# Altium PCB pibs_2u_diff_usb_eth.PcbDoc
Units mil, origin at the board's own origin, x right, y up, seen from the top; angles counter-clockwise.
Board outline 4230 x 1950 mil, 2 copper layers (Top Layer, Bottom Layer); 31 components, 39 nets, 212 pads, 20 vias.
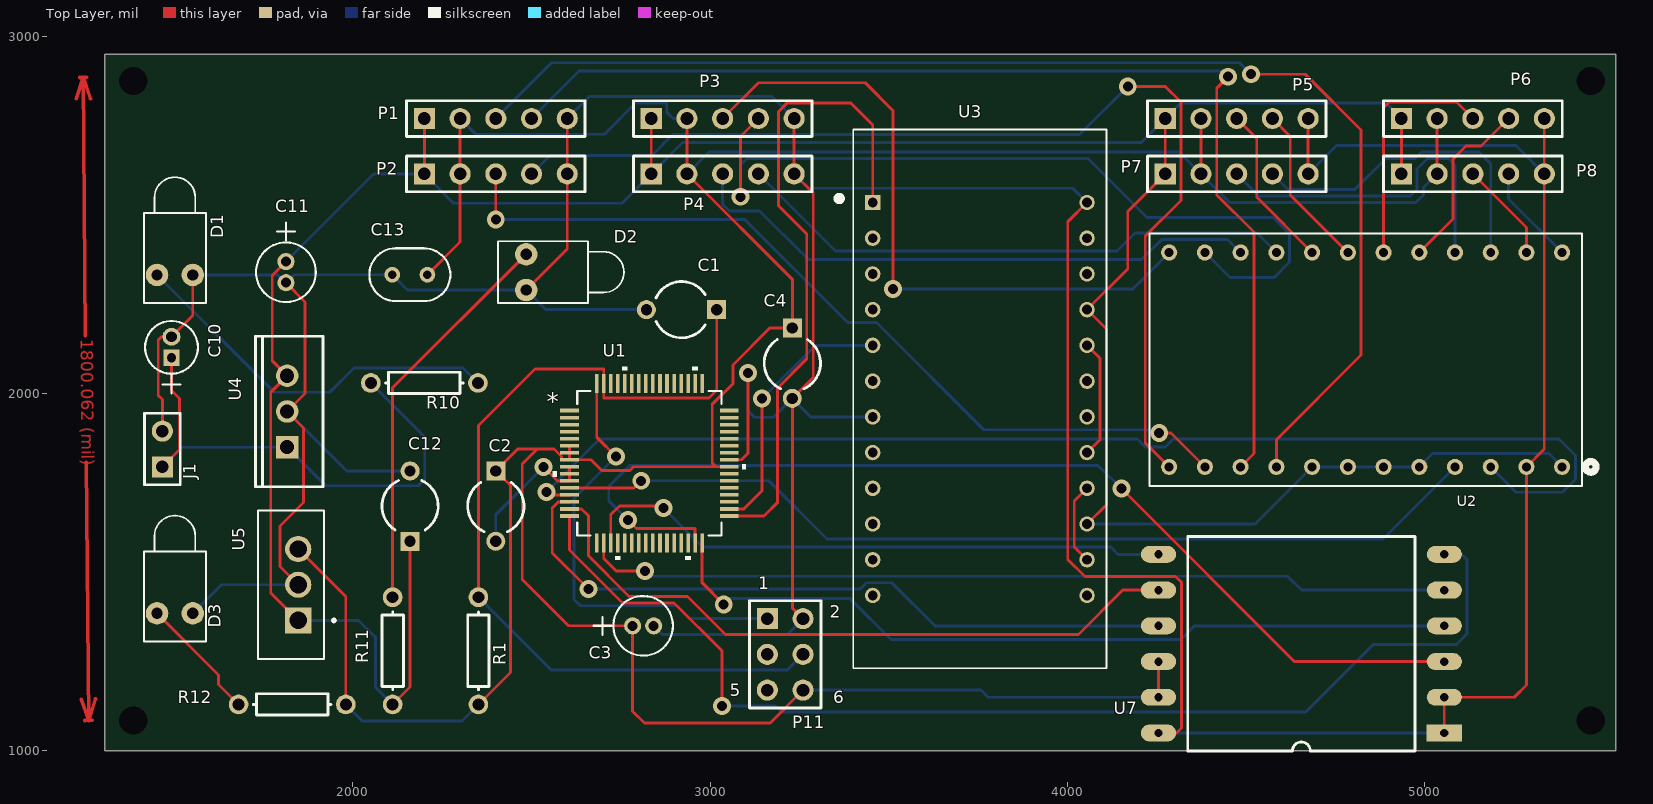
[diagram p0: Top Layer view]
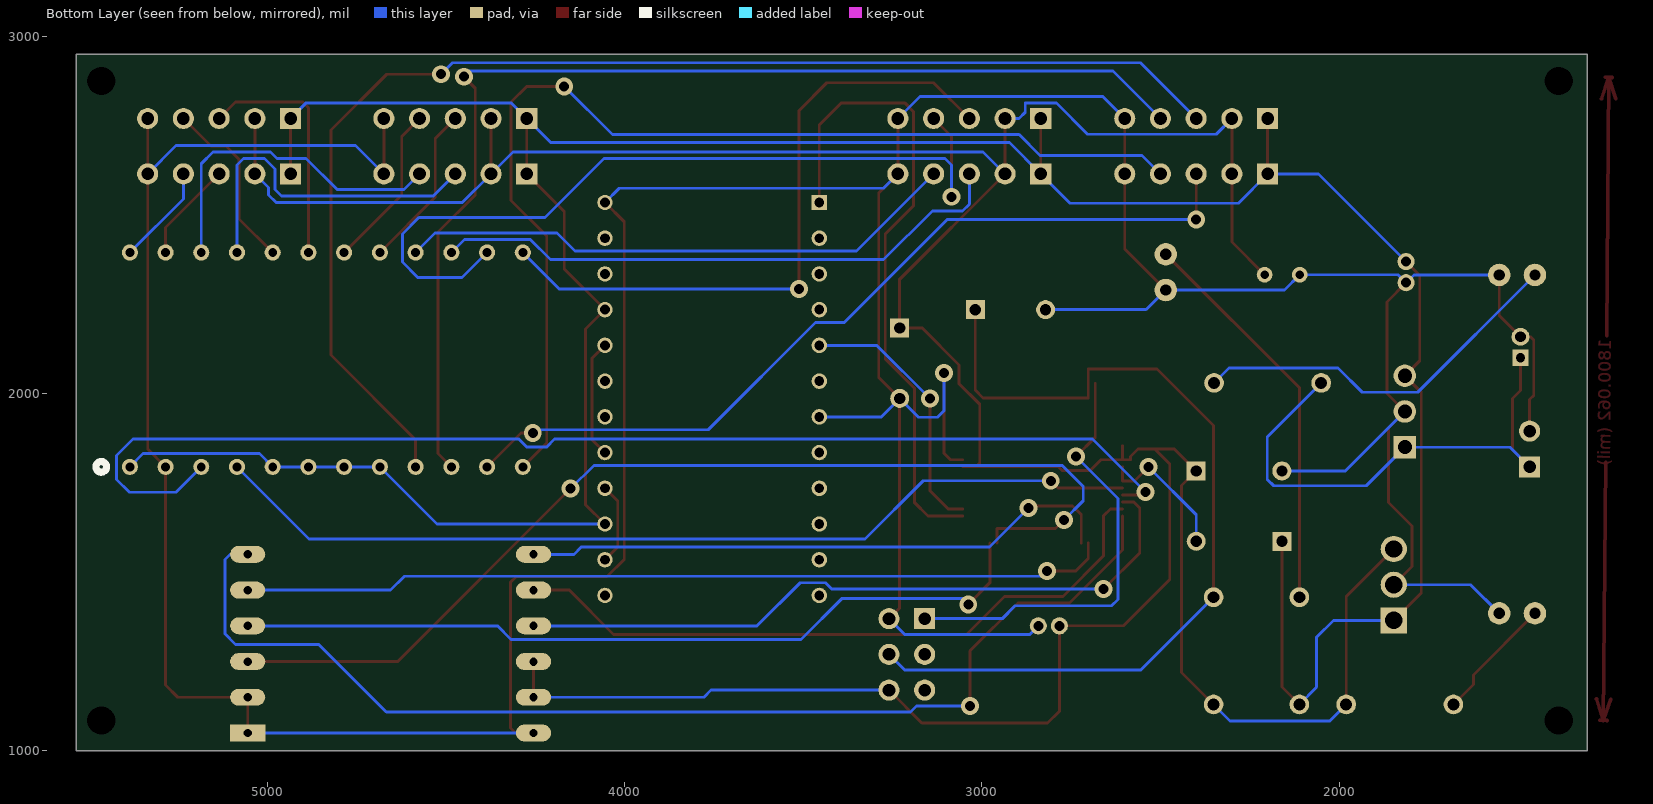
[diagram p1: Bottom Layer view, seen from below]

## Layer stack, top to bottom
Top Solder: solder mask 0.4, Solder Resist, Dk 3.5
Top Layer: signal copper 1.4
Dielectric 1: dielectric 12.6, FR-4, Dk 4.8
Bottom Layer: signal copper 1.4
Bottom Solder: solder mask 0.4, Solder Resist, Dk 3.5

## Board outline
1305,1000 5535,1000 5535,2950 3950,2950 1305,2950 1305,1980

## Design rules (kind name [scope] priority, off if disabled: settings)
Clearance [All] p1: gap=10
PolygonConnect [All] p1: connectstyle=Relief reliefconductorwidth=10 reliefentries=4 polygonreliefangle="90 Angle" airgapwidth=10
RoomDefinition um232r [InComponentClass('um232r')] p1: confinementstyle=ConfineIn formatcopy=TRUE lockcomponents=FALSE outline 0,0 2000,0 2000,1000 0,1000
RoomDefinition i2c_mux [InComponentClass('i2c_mux')] p2: confinementstyle=ConfineIn formatcopy=TRUE lockcomponents=FALSE outline 0,0 2000,0 2000,1000 0,1000
RoomDefinition ethernet [InComponentClass('ethernet')] p3: confinementstyle=ConfineIn formatcopy=TRUE lockcomponents=FALSE outline 0,0 2000,0 2000,1000 0,1000
RoomDefinition power [InComponentClass('power')] p4: confinementstyle=ConfineIn formatcopy=TRUE lockcomponents=FALSE outline 7045,3950 9930,3950 9930,4730 7045,4730
RoomDefinition micro [InComponentClass('micro')] p5: confinementstyle=ConfineIn formatcopy=TRUE lockcomponents=FALSE outline 7045,3540 8340,3540 8340,4000 7045,4000
RoomDefinition headers [InComponentClass('headers')] p6: confinementstyle=ConfineIn formatcopy=TRUE lockcomponents=FALSE outline 7045,2960 7265,2960 7265,3485 7045,3485
RoutingVias [All] p1: holewidth=28 width=50 viastyle="Through Hole" minholewidth=28 minwidth=50 maxholewidth=28 maxwidth=50
SolderMaskExpansion [All] p1: expansion=4
Width [All] p1: maxlimit=10 minlimit=5 preferedwidth=8
30 further rules are at their usual default settings.

## Classes and differential pairs
component class power: C10 C11 C12 C13 D1 D2 D3 J1 R10 R11 R12 U4 U5
component class micro: C1 C2 C3 C4 R1 U1
component class headers: P1 P2 P3 P4 P5 P6 P7 P8 P11
component class ethernet: U7
component class i2c_mux: U2
component class um232r: U3
net class SC[7..0]: SC0 SC1 SC2 SC3 SC4 SC5 SC6 SC7
net class SD[7..0]: SD0 SD1 SD2 SD3 SD4 SD5 SD6 SD7

## Components (designator, comment, footprint, x,y, rotation, side; value= is the part's Value field where it differs from the comment)
C1 "Cap2" CAPR5-4X5 2920,2235 r180 top
C2 "Cap2" CAPR5-4X5 2400,1685 r270 top
C3 "10u" CAP_UHC_4X7_NCH 2782.97,1350 r0 top
C4 "Cap2" CAPR5-4X5 3230,2085 r270 top
C10 "2.2u" PCAP_3x5-THRU-ELECT_NCA 1492.13,2100 r90 top
C11 "10u" CAP_UHC_4X7_NCH 1812.44,2369.41 r270 top
C12 "Cap2" CAPR5-4X5 2160,1685 r90 top
C13 "33u" CAP_FG16X5R1E336MRT06_TDK 2159.32,2332.89 r0 top
D1 "LED1" LED-1 1501.74,2332.13 r90 top
D2 "LED1" LED-1 2485,2340 r0 top
D3 "LED1" LED-1 1501.74,1385 r90 top
J1 "Header 2" HDR1X2 1466.56,1795 r90 top
P1 "Header 5" HDR1X5 2200,2770 r0 top
P2 "Header 5" HDR1X5 2200,2615 r0 top
P3 "Header 5" HDR1X5 2835,2770 r0 top
P4 "Header 5" HDR1X5 2835,2615 r0 top
P5 "Header 5" HDR1X5 4273.94,2770 r0 top
P6 "Header 5" HDR1X5 4935,2770 r0 top
P7 "Header 5" HDR1X5 4273.94,2615 r0 top
P8 "Header 5" HDR1X5 4935,2615 r0 top
P11 "Prog" HDR2X3 3160,1370 r270 top
R1 "Res1" AXIAL-0.3 2351.26,1280 r270 top
R10 "Res1" AXIAL-0.3 2200,2030 r180 top
R11 "Res1" AXIAL-0.3 2111.26,1280 r270 top
R12 "Res1" AXIAL-0.3 1830,1130 r0 top
U1 "MCF51QE128CLH" QFP64_FRE 2830,1805 r0 top
U2 "1-390262-1" 1-390262-1_TYC 5385,1795 r180 top
U3 "UM232R" MODULE_UM232R 3755,1985 r0 top
U4 "LT323AT#PBF" TO-220-AB 1815.96,1950 r90 top
U5 "LM3940IT-3.3" TO254P1054X470X1955-3 1846.86,1465 r90 top
U7 "wiz810smj" wiznet_DIP12 5055,1050 r180 top

## Footprints (in the part's own frame and the unit in brackets; to place one, negate y for a bottom-side part, rotate by r counter-clockwise, add the part's x,y. Pads: shape width x height; smd on the part's side, far side on the other; paste and mask are expansions set on the pad)
1-390262-1_TYC [mil]
  round 45 hole 25 mask+0: 1(0,0) 2(100,0) 3(200,0) 4(300,0) 5(400,0) 6(500,0) 7(600,0) 8(700,0) 9(800,0) 10(900,0) 11(1000,0) 12(1100,0) 13(1100,-600) 14(1000,-600) 15(900,-600) 16(800,-600) 17(700,-600) 18(600,-600) 19(500,-600) 20(400,-600) 21(300,-600) 22(200,-600) 23(100,-600) 24(0,-600)
  silkscreen extent -95,-654 1155,54, body extent 0,0 10,10, height 10
AXIAL-0.3 [mm] "Axial Device, Thru-Hole; 2 Leads; 0.3 in Pin Spacing"
  round 1.4 hole 0.85: 1(-3.81,0) 2(3.81,0)
  silkscreen extent -2.77,-0.76 2.77,0.76
CAP_FG16X5R1E336MRT06_TDK [mil]
  round 44 / inner round 60 / far side round 44 hole 24 mask+0: 1(-49.21,0) 2(49.21,0)
  silkscreen extent -113,-74 114,74, body extent -59,-69 158,69, height 236
CAP_UHC_4X7_NCH [mil]
  round 48 / inner round 60 / far side round 48 hole 28 mask+0: 1(0,0) 2(59.06,0)
  silkscreen extent -109,-83 113,83, body extent -49,-78 109,78, height 316
CAPR5-4X5 [mm] "Capacitor; 2 Leads"
  rect 1.35x1.35 hole 0.8: 1(-2.5,0)
  round 1.35 hole 0.8: 2(2.5,0)
  silkscreen extent -1.69,-2 1.82,2
HDR1X2 [mm] "Connector; Header; 2 Position"
  rect 1.5x1.5 hole 0.9: 1(0,0)
  round 1.5 hole 0.9: 2(2.54,0)
  silkscreen extent -1.27,-1.27 3.81,1.27
HDR1X5 [mm] "Connector; Header; 5 Position"
  rect 1.5x1.5 hole 0.9: 1(0,0)
  round 1.5 hole 0.9: 2(2.54,0) 3(5.08,0) 4(7.62,0) 5(10.16,0)
  silkscreen extent -1.27,-1.27 11.43,1.27
HDR2X3 [mm] "Connector; Header; 3x2 Position"
  rect 1.5x1.5 hole 0.9: 1(0,0)
  round 1.5 hole 0.9: 2(0,2.54) 3(2.54,0) 4(2.54,2.54) 5(5.08,0) 6(5.08,2.54)
  silkscreen extent -1.27,-1.27 6.35,3.81
LED-1 [mm] "LED; 2 Leads"
  round 1.6 hole 0.8: 1(0,1.27) 2(0,-1.27)
  silkscreen extent -2,-2.2 6.95,2.2
MODULE_UM232R [mm]
  rect 1.1x1.1 hole 0.7: 1(-7.62,13.97)
  round 1.1 hole 0.7: 2(-7.62,11.43) 3(-7.62,8.89) 4(-7.62,6.35) 5(-7.62,3.81) 6(-7.62,1.27) 7(-7.62,-1.27) 8(-7.62,-3.81) 9(-7.62,-6.35) 10(-7.62,-8.89) 11(-7.62,-11.43) 12(-7.62,-13.97) 13(7.62,-13.97) 14(7.62,-11.43) 15(7.62,-8.89) 16(7.62,-6.35) 17(7.62,-3.81) 18(7.62,-1.27) 19(7.62,1.27) 20(7.62,3.81) 21(7.62,6.35) 22(7.62,8.89) 23(7.62,11.43) 24(7.62,13.97)
  silkscreen extent -10.2,-19.15 9,19.15
PCAP_3x5-THRU-ELECT_NCA [mil]
  rect 46x46 / inner round 60 / far side rect 46x46 hole 26 mask+0: 1(0,0)
  round 50 / inner round 60 / far side round 50 hole 30 mask+0: 2(59.06,0)
  silkscreen extent -99,-74 103,74, body extent -39,-69 100,69, height 188
QFP64_FRE [mil]
  rect 53x10 smd paste+0 mask+0: 1(-223.5,147.64) 2(-223.5,127.95) 3(-223.5,108.27) 4(-223.5,88.58) 5(-223.5,68.9) 6(-223.5,49.21) 7(-223.5,29.53) 8(-223.5,9.84) 9(-223.5,-9.84) 10(-223.5,-29.53) 11(-223.5,-49.21) 12(-223.5,-68.9) 13(-223.5,-88.58) 14(-223.5,-108.27) 15(-223.5,-127.95) 16(-223.5,-147.64) 33(223.5,-147.64) 34(223.5,-127.95) 35(223.5,-108.27) 36(223.5,-88.58) 37(223.5,-68.9) 38(223.5,-49.21) 39(223.5,-29.53) 40(223.5,-9.84) 41(223.5,9.84) 42(223.5,29.53) 43(223.5,49.21) 44(223.5,68.9) 45(223.5,88.58) 46(223.5,108.27) 47(223.5,127.95) 48(223.5,147.64)
  rect 10x53 smd paste+0 mask+0: 17(-147.64,-223.5) 18(-127.95,-223.5) 19(-108.27,-223.5) 20(-88.58,-223.5) 21(-68.9,-223.5) 22(-49.21,-223.5) 23(-29.53,-223.5) 24(-9.84,-223.5) 25(9.84,-223.5) 26(29.53,-223.5) 27(49.21,-223.5) 28(68.9,-223.5) 29(88.58,-223.5) 30(108.27,-223.5) 31(127.95,-223.5) 32(147.64,-223.5) 49(147.64,223.5) 50(127.95,223.5) 51(108.27,223.5) 52(88.58,223.5) 53(68.9,223.5) 54(49.21,223.5) 55(29.53,223.5) 56(9.84,223.5) 57(-9.84,223.5) 58(-29.53,223.5) 59(-49.21,223.5) 60(-68.9,223.5) 61(-88.58,223.5) 62(-108.27,223.5) 63(-127.95,223.5) 64(-147.64,223.5)
  silkscreen extent -270,-270 270,270, body extent -236,-236 236,236, height 63
TO254P1054X470X1955-3 [mm]
  rect 1.86x1.86 hole 1.24: 1(-2.54,0)
  round 1.86 hole 1.24: 2(0,0) 3(2.54,0)
  silkscreen extent -5.27,-2.64 5.27,2.86, body extent -5.08,-2.29 5.08,2.29, height 19.56
TO-220-AB [mm] "TO, Thru-Hole, Vertical, Heatsink Mounted; 3 In-Line Leads; Pitch 2.54 mm"
  rect 1.6x1.6 hole 1: 1(-2.54,0)
  round 1.6 hole 1: 2(0,0) 3(2.54,0)
  silkscreen extent -5.35,-2.55 5.35,2.25
wiznet_DIP12 [mm]
  rect 2.5x1.2 hole 0.6: 1(0,0)
  oval 2.5x1.2 hole 0.6: 2(0,-2.54) 3(0,-5.08) 4(0,-7.62) 5(0,-10.16) 6(0,-12.7) 7(20.32,-12.7) 8(20.32,-10.16) 9(20.32,-7.62) 10(20.32,-5.08) 11(20.32,-2.54) 12(20.32,0)
  silkscreen extent 2.08,-13.97 18.24,1.27

## Part data
C1 C2 C4 C12: "Capacitor"
C3: library part USA1C100MDD1TE, "No Description Available"
C10: library part UMA1V2R2MCD2, "No Description Available"
C11: library part USR1E100MDD1TE, "No Description Available"
C13: library part FG16X5R1E336MRT06, "No Description Available"
D1 D2 D3: "Typical RED GaAs LED"
J1: "Header, 2-Pin"
P1 P2 P3 P4 P5 P6 P7 P8: "Header, 5-Pin"
P11: library part "Header 3X2", "Header, 3-Pin, Dual row"
R1 R10 R11 R12: "Resistor"
U1 U2 U4: "No Description Available"
U3: "FT232R USB 2.0 to UART (RS232) Bridge Interface Evaluation Board"
U5: "1-A, low-dropout voltage regulator for 5-V to 3.3-V conversion 3-TO-220 -40 to 125"

## Free pads (board coordinates)
  round 60 hole 78.74 unplated: 1(1385,2875) 1(5465,2875) 2(1385,1085) 2(5465,1085)

## Via types
v1: diameter 50, hole 28, Top Layer to Bottom Layer, 20 vias

## Nets (pads, with @x,y where several pads share a name; then routed paths per layer and width w, separated by ;. In a path a pad name is that pad's centre, name@x,y a point inside that pad or via, vN(x,y) a via of type N, cw(c..) or ccw(c..) an arc to the next point about the centre after c; other vN are vias at no path point)
GND: C1.2 C3.2 C4.2 C10.2 C11.2 C12.2 C13.1 D1.2 D2.2 D3.2 J1.2 P1.5 P2.5 P3.5 P4.5 P5.5 P6.5 P7.5 P8.5 P11.2 U1.41 U2.2 U3.7 U3.24 U4.2 U5.2 U7.1 U7.2 U7.12 | length 13763.1
  Top Layer w8: J1.2 1466.56,1983.44 1455,1995 1455,2150.06 1464,2159.06 C10.2 1551.74,2218.67 D1.2 ; C11.2 1866,2256.8 1866,2000.04 U4.2 1862,1903.96 1862,1695 1796,1629 1796,1515.87 U5.2 ; D2.2 2600,2405 P2.5 P1.5 ; U1.41 3088,1814.84 3106,1832.84 v1(3106,2058) ; P3.5 P4.5 3288.58,2561.42 3288.58,2045.15 C4.2 3230,1400 P11.2 ; U3.24 4001,2481 4001,1536 4049,1488 4303,1488 4319,1472 4319,1064 4305,1050 U7.12 ; P7.5 P5.5 ; U7.1 U7.2 5251,1150 5285,1184 U2.2 5335,1845 P8.5 P6.5
  Bottom Layer w8: D3.2 1631.74,1465 U5.2 ; D1.2 1790.67,2332.13 C11.2 1834.97,2332.89 C13.1 2153,2290 D2.2 2540,2235 C1.2 ; U4.2 1982.54,1783.43 C12.2 ; P1.5 2661.53,2831.53 3173.47,2831.53 P3.5 ; C3.2 2866.03,1326 3216,1326 P11.2 ; v1(3106,2058) 3106,1952 3124,1934 3177.43,1934 C4.2 3281.57,1935 U3.7 ; P4.5 3275,2575 4015,2575 U3.24 ; U7.12 U7.1 ; P7.5 4753.47,2694.53 5255.47,2694.53 P8.5
NetC1_1: C1.1 P11.4 R1.1 U1.63 | length 2540.3
  Top Layer w8: R1.1 2351.26,1911 2509.26,2069 2702.05,2069 U1.63 2702.05,1988 2996.64,1988 3018.43,2009.79 C1.1
  Bottom Layer w8: R1.1 2555.26,1226 3216,1226 P11.4
NetC2_2: C2.2 U1.9 U1.10 U1.11 | length 391.6
  Top Layer w8: v1(2533.5,1794.5) 2572.21,1755.79 U1.11 U1.10 U1.9
  Bottom Layer w8: C2.2 2400,1661 v1(2533.5,1794.5)
NetD1_1: D1.1 R10.1 | length 1079.7
  Bottom Layer w8: D1.1 1779.87,2004 1935,2004 2003,2072 2308,2072 R10.1
NetD2_1: D2.1 R11.1 | length 1114.8
  Top Layer w8: R11.1 2111.26,2016.26 D2.1
NetD3_1: D3.1 R12.1 | length 349.5
  Top Layer w8: D3.1 1624,1212.74 1624,1186 R12.1
NetP11_1: P11.1 U1.64 | length 1238.8
  Top Layer w8: U1.64 2682.36,1877.64 v1(2736,1824)
  Bottom Layer w8: v1(2736,1824) 2618.85,1706.85 2618.85,1424 2636.85,1406 2907,1406 2943,1370 P11.1
NetU1_12: U1.12 U2.4 | length 2637.9
  Top Layer w8: U1.12 2787.1,1736.1 v1(2807,1756)
  Bottom Layer w8: v1(2807,1756) 3164,1756 3327,1593 4883,1593 U2.4
NetU1_13: U1.13 U2.3 | length 3396.1
  Top Layer w8: v1(2541.57,1724.43) 2549.58,1716.42 U1.13
  Bottom Layer w8: v1(2541.57,1724.43) 2690.14,1873 4195.8,1873 4218.11,1850.69 4273.8,1850.69 4296.11,1873 5376,1873 5422,1827 5422,1760 5386,1724 5256,1724 U2.3
NetU1_14: U1.14 U7.9 | length 1977.6
  Top Layer w8: U1.14 2574.73,1696.73 2558,1680 2558,1554 v1(2659,1453)
  Bottom Layer w8: v1(2659,1453) 3420,1453 3437.65,1470.65 3508.35,1470.65 3629,1350 U7.9
NetU1_15: U1.15 U7.8 | length 1910.9
  Top Layer w8: U1.15 2640,1677.05 2659,1658.05 2659,1545.97 2772.97,1432 2937,1432 3043,1326 4031,1326 4155,1450 U7.8
NetU1_16: U1.16 U7.6 | length 3253.9
  Top Layer w8: U1.16 2606.5,1562.5 2755,1414 2899,1414 3033,1280 v1(3033,1126)
  Bottom Layer w8: v1(3033,1126) 3183,1126 3200,1109 4667,1109 4856,1298 5089,1298 5119,1328 5119,1536 5105,1550 U7.6
NetU1_18: U1.18 U7.5 | length 2432.9
  Top Layer w8: U1.18 2702.05,1538.04 2737.09,1503 v1(2818,1503)
  Bottom Layer w8: v1(2818,1503) 2832.35,1488.65 4616.35,1488.65 4655,1450 U7.5
NetU1_19: U1.19 U7.7 | length 1679.5
  Top Layer w8: U1.19 2721.73,1661.3 2746.31,1685.87 2863.13,1685.87 v1(2869,1680)
  Bottom Layer w8: v1(2869,1680) 2978.35,1570.65 4121.35,1570.65 4142,1550 U7.7
NetU1_31: U1.31 U7.3 | length 2945.8
  Top Layer w8: v1(2770,1646) 2794,1622 2957.95,1622 U1.31 ; v1(4151,1734) 4635,1250 U7.3
  Bottom Layer w8: v1(2770,1646) 2716,1700 2716,1740.26 2774.74,1799 4086,1799 v1(4151,1734)
NetU1_32: U1.32 U7.4 | length 2283.1
  Top Layer w8: U1.32 2977.64,1470.36 v1(3038,1410)
  Bottom Layer w8: v1(3038,1410) 3054,1426 3392,1426 3506,1312 4318,1312 4356,1350 U7.4
NetU1_33: U1.33 U3.1 | length 1828.3
  Top Layer w8: U1.33 3150.36,1657.36 3189,1696 3189,2016 3270.58,2097.58 3270.58,2446.42 3191,2526 3191,2789 3216,2814 3393,2814 3455,2752 U3.1
NetU1_34: U1.34 U3.5 | length 742.3
  Top Layer w8: U1.34 3094,1677.05 3145,1728.05 v1(3145,1986)
  Bottom Layer w8: v1(3145,1986) 3294,2135 U3.5
NetU3_14: U3.14 U3.16 | length 229.8
  Top Layer w8: U3.14 4019,1571 4019,1699 U3.16
NetU3_17: U3.17 U3.20 | length 329.8
  Top Layer w8: U3.17 4091,1871 4091,2099 U3.20
SC0: P1.4 U2.10 | length 3175.4
  Top Layer w8: v1(4450,2887) 4418,2855 4418,2556 4522,2452 4522,1832 U2.10
  Bottom Layer w8: P1.4 2633,2903 4434,2903 v1(4450,2887)
SC1: P2.4 U2.12 | length 3027.9
  Top Layer w8: v1(4169,2860) 4274,2860 4318,2816 4318,2541 4218,2441 4218,1862 U2.12
  Bottom Layer w8: P2.4 2552,2667 2837.5,2667 2895.5,2725 4034,2725 v1(4169,2860)
SC2: P3.4 U2.14 | length 2323.8
  Top Layer w8: v1(3085,2551) 3085,2720 P3.4
  Bottom Layer w8: v1(3085,2551) 3085,2640 3103.53,2658.53 4057.47,2658.53 4223,2493 4576,2493 4622,2447 4622,2368 4579,2325 4455,2325 U2.14
SC3: P4.4 U2.16 | length 1583
  Bottom Layer w8: P4.4 3351,2399 4138.81,2399 4189.31,2449.5 4530.5,2449.5 U2.16
SC4: P5.4 U2.18 | length 462.4
  Top Layer w8: P5.4 4624,2719.94 4624,2556 U2.18
SC5: P6.4 U2.20 | length 503.2
  Top Layer w8: U2.20 5079,2489 5079,2656 5116,2693 5158,2693 P6.4
SC6: P7.4 U2.22 | length 934.8
  Bottom Layer w8: P7.4 4617.47,2571.47 4804.42,2571.47 4891.47,2658.53 4973.47,2658.53 4991.47,2676.53 5152,2676.53 5185,2643.53 U2.22
SC7: P8.4 U2.24 | length 282.1
  Bottom Layer w8: P8.4 5235,2545 U2.24
SD0: P1.3 U2.9 | length 3605.7
  Top Layer w8: v1(4514,2894) 4666,2894 4822,2738 4822,2108 4585,1871 U2.9
  Bottom Layer w8: P1.3 2556,2926 4482,2926 v1(4514,2894)
SD1: P2.3 U2.11 | length 2399.6
  Top Layer w8: v1(2400,2487) P2.3 ; v1(4257,1890) 4290,1890 U2.11
  Bottom Layer w8: v1(2400,2487) 3097,2487 3385,2199 3466,2199 3766,1899 4248,1899 v1(4257,1890)
SD2: P3.3 U2.13 | length 1865
  Top Layer w8: P3.3 3135,2870 3434,2870 3512,2792 v1(3512,2293)
  Bottom Layer w8: v1(3512,2293) 4183,2293 U2.13
SD3: P4.3 U2.15 | length 1637.6
  Bottom Layer w8: P4.3 3035,2530.29 3053.82,2511.47 3138.53,2511.47 3275,2375 4207.5,2375 4264,2431.5 4448.5,2431.5 U2.15
SD4: P5.3 U2.17 | length 462.4
  Top Layer w8: P5.3 4530,2713.94 4530,2550 U2.17
SD5: P6.3 U2.19 | length 680.7
  Top Layer w8: U2.19 4885,2800 4901,2816 5089,2816 P6.3
SD6: P7.3 U2.21 | length 966.5
  Bottom Layer w8: P7.3 4535.47,2553.47 4960.53,2553.47 4978.53,2571.47 4978.53,2629.06 5008,2658.53 5066.47,2658.53 5085,2640 U2.21
SD7: P8.3 U2.23 | length 282.1
  Top Layer w8: P8.3 5285,2465 U2.23
VCC: C10.1 J1.1 R10.2 U4.1 | length 1476.5
  Top Layer w8: J1.1 1515,1843.44 1515,1986 1492.13,2008.87 C10.1
  Bottom Layer w8: J1.1 1521.56,1850 U4.1 1923.96,1742 2183,1742 2201,1760 2201,1879 R10.2
VDDA: C2.1 C3.1 C4.1 C13.2 P1.2 P2.2 P3.2 P4.2 P5.2 P6.2 P7.2 P8.2 P11.6 R1.2 R12.2 U1.6 U1.7 U1.8 U1.40 U5.3 U7.10 U7.11 | length 9944.4
  Top Layer w8: U5.3 1980,1431.87 R12.2 ; C13.2 2300,2424.35 P2.2 P1.2 ; R1.2 2441,1219.74 2441,1742.43 C2.1 2461.57,1845 2515.82,1845 ; U1.6 U1.7 U1.8 ; P3.2 P4.2 3230,2320 C4.1 3166.94,2183.43 3063.51,2080 3063.51,2027.58 3005.93,1970 3005.93,1805.23 3016,1795.16 ; U1.40 3016,1795.16 ; P11.6 3168,1078 2816,1078 2782.97,1111.03 C3.1 2603.56,1350 2474,1479.56 2474,1803.18 2515.82,1845 ; U7.11 U7.10 ; P7.2 P5.2 ; P8.2 P6.2 ; 2515.82,1845 2563,1845 2584,1824 2584,1814.84 U1.8 ; U1.8 2666.38,1814.84 2696.74,1784.48 2774.74,1784.48 2785.42,1795.16 3016,1795.16
  Bottom Layer w8: R12.2 2026,1084 2305.26,1084 R1.2 ; P1.2 2344,2726 2703.94,2726 2791.47,2813.53 2878.53,2813.53 2878.53,2787.47 2896,2770 P3.2 ; P4.2 2996.53,2676.53 4312.41,2676.53 P7.2 4453.47,2535.47 4976,2535.47 4996.53,2556 4996.53,2576.53 P8.2 ; P11.6 3758,1170 3778,1150 U7.11
VDDB: C11.1 C12.1 P1.1 P2.1 P3.1 P4.1 P5.1 P6.1 P7.1 P8.1 R11.2 U2.1 U2.5 U2.6 U2.7 U2.8 U3.15 U3.21 U4.3 U5.1 | length 8564.2
  Top Layer w8: C11.1 1774,2330.97 1774,2091.96 U4.3 1770,2004.04 1770,1441.87 U5.1 ; R11.2 2160,1178.74 C12.1 ; P2.1 P1.1 ; P4.1 P3.1 ; U3.15 4109,1689 4109,2181 U3.21 4169,2349 4169,2510.06 P7.1 P5.1 ; P8.1 P6.1
  Bottom Layer w8: C11.1 2058.03,2615 P2.1 2282,2533 2753,2533 P4.1 2923,2703 4206.94,2703 P5.1 4317.94,2814 4891,2814 P6.1 ; U5.1 2016,1365 2063,1318 2063,1178.26 R11.2 ; U3.15 4525,1635 U2.8 U2.7 U2.6 U2.5 5022,1832 5348,1832 U2.1
pads on no net: P11.3 P11.5 U1.1 U1.2 U1.3 U1.4 U1.5 U1.17 U1.20 U1.21 U1.22 U1.23 U1.24 U1.25 U1.26 U1.27 U1.28 U1.29 U1.30 U1.35 U1.36 U1.37 U1.38 U1.39 U1.42 U1.43 U1.44 U1.45 U1.46 U1.47 U1.48 U1.49 U1.50 U1.51 U1.52 U1.53 U1.54 U1.55 U1.56 U1.57 U1.58 U1.59 U1.60 U1.61 U1.62 U3.2 U3.3 U3.4 U3.6 U3.8 U3.9 U3.10 U3.11 U3.12 U3.13 U3.18 U3.19 U3.22 U3.23
copper on no net: | length 1737.6
  Top Layer w10: 1225.5,2824.84 1245,2885 ; 1235,2884.92 1255,2885.08 ; 1239.5,1144.83 1260,1085 ; 1250,1084.92 1270,1085.08 ; 1251.02,2162.71 1245,2885 ; 1253.98,1807.29 1260,1085 ; 1265.5,2825.17 1245,2885 ; 1279.5,1145.16 1260,1085

## Other copper
Top Layer:
  text "1800.062 (mil)" at 1225.91,2152.51 h60 r270.48

## Silkscreen, mask and mechanical layers (free items; w line width, h text height)
Drill Drawing:
  circle w10: c1135.62,4145.83 r33.33
  circle w10: c1135.62,3995.83 r20
  circle w10: c1135.62,3995.83 r33.33
  lines w10: 1102.29,3579.17 1168.96,3579.17 1135.62,3512.5 1102.29,3579.17 ; 1102.29,3679.17 1118.96,3679.17 1118.96,3662.5 1152.29,3662.5 1152.29,3679.17 1168.96,3679.17 1168.96,3712.5 1152.29,3712.5 1152.29,3729.17 1118.96,3729.17 1118.96,3712.5 1102.29,3712.5 1102.29,3679.17 ; 1102.29,3845.83 1135.62,3812.5 1168.96,3845.83 1135.62,3879.17 1102.29,3845.83 ; 1102.29,4262.5 1168.96,4262.5 1168.96,4329.17 1102.29,4329.17 1102.29,4262.5 ; 1102.29,4412.5 1168.96,4412.5 1168.96,4479.17 1102.29,4479.17 1102.29,4412.5 ; 1102.29,4729.17 1118.96,4729.17 1135.62,4712.5 1152.29,4729.17 1168.96,4729.17 1152.29,4745.83 1168.96,4762.5 1152.29,4762.5 1135.62,4779.17 1118.96,4762.5 1102.29,4762.5 1118.96,4745.83 1102.29,4729.17 ; 1102.29,5012.5 1135.62,5029.17 1168.96,5012.5 1152.29,5045.83 1168.96,5079.17 1135.62,5062.5 1102.29,5079.17 1118.96,5045.83 1102.29,5012.5 ; 1102.29,5229.17 1168.96,5229.17 1135.62,5162.5 1102.29,5229.17 ; 1102.29,5329.17 1118.96,5329.17 1135.62,5312.5 1152.29,5329.17 1168.96,5329.17 1152.29,5345.83 1168.96,5362.5 1152.29,5362.5 1135.62,5379.17 1118.96,5362.5 1102.29,5362.5 1118.96,5345.83 1102.29,5329.17 ; 1115.62,3565.83 1155.62,3565.83 1135.62,3525.83 1115.62,3565.83 ; 1115.62,4275.83 1155.62,4275.83 1155.62,4315.83 1115.62,4315.83 1115.62,4275.83 ; 1115.62,4735.83 1125.62,4735.83 1135.62,4725.83 1145.62,4735.83 1155.62,4735.83 1145.62,4745.83 1155.62,4755.83 1145.62,4755.83 1135.62,4765.83 1125.62,4755.83 1115.62,4755.83 1125.62,4745.83 1115.62,4735.83
  lines w15: 1042.5,3467.5 11923.47,3467.5 ; 1042.5,5417.5 11923.47,5417.5 ; 1593.38,3317.5 1593.38,5567.5 ; 2183.22,3317.5 2183.22,5567.5 ; 3282.9,3317.5 3282.9,5567.5 ; 3788.78,3317.5 3788.78,5567.5 ; 4522.58,3317.5 4522.58,5567.5 ; 6022.13,3317.5 6022.13,5567.5 ; 6611.98,3317.5 6611.98,5567.5 ; 7357.78,3317.5 7357.78,5567.5 ; 8357.49,3317.5 8357.49,5567.5 ; 9211.25,3317.5 9211.25,5567.5 ; 10544.86,3317.5 10544.86,5567.5 ; 1042.5,3317.5 11923.47,3317.5 11923.47,5567.5 1042.5,5567.5 1042.5,3317.5
  text "Symbol" at 1132.5,5462.5 h72
  text "Count" at 1638.38,5462.5 h72
  text "Hole Size" at 2228.22,5462.5 h72
  text "Plated" at 3327.9,5462.5 h72
  text "Hole Type" at 3833.78,5462.5 h72
  text "Drill Layer Pair" at 4567.58,5462.5 h72
  text "Via/Pad" at 6067.13,5462.5 h72
  text "Pad Shape" at 6656.98,5462.5 h72
  text "Template" at 7402.78,5462.5 h72
  text "Description" at 8402.49,5462.5 h72
  text "Hole Tolerance (+)" at 9256.25,5462.5 h72
  text "Hole Tolerance (-)" at 10589.86,5462.5 h72
  text "1" at 1638.38,5312.5 h60
  text "26.00mil (0.660mm)" at 2228.22,5312.5 h60
  text "PTH" at 3327.9,5312.5 h60
  text "Round" at 3833.78,5312.5 h60
  text "Top Layer - Bottom Layer" at 4567.58,5312.5 h60
  text "Pad" at 6067.13,5312.5 h60
  text "Rounded" at 6656.98,5312.5 h60
  text "s117h66zc152m117" at 7402.78,5312.5 h60
  text "1" at 1638.38,5162.5 h60
  text "30.00mil (0.762mm)" at 2228.22,5162.5 h60
  text "PTH" at 3327.9,5162.5 h60
  text "Round" at 3833.78,5162.5 h60
  text "Top Layer - Bottom Layer" at 4567.58,5162.5 h60
  text "Pad" at 6067.13,5162.5 h60
  text "Rounded" at 6656.98,5162.5 h60
  text "c127h76z152m127" at 7402.78,5162.5 h60
  text "2" at 1638.38,5012.5 h60
  text "24.00mil (0.610mm)" at 2228.22,5012.5 h60
  text "PTH" at 3327.9,5012.5 h60
  text "Round" at 3833.78,5012.5 h60
  text "Top Layer - Bottom Layer" at 4567.58,5012.5 h60
  text "Pad" at 6067.13,5012.5 h60
  text "Rounded" at 6656.98,5012.5 h60
  text "c112h61z152m112" at 7402.78,5012.5 h60
  text "3" at 1638.38,4862.5 h60
  text "39.37mil (1.000mm)" at 2228.22,4862.5 h60
  text "PTH" at 3327.9,4862.5 h60
  text "Round" at 3833.78,4862.5 h60
  text "Top Layer - Bottom Layer" at 4567.58,4862.5 h60
  text "Pad" at 6067.13,4862.5 h60
  text "(Mixed)" at 6656.98,4862.5 h60
  text "(Mixed)" at 7402.78,4862.5 h60
  text "B" at 1103.41,4852.51 h66.67
  text "3" at 1638.38,4712.5 h60
  text "48.82mil (1.240mm)" at 2228.22,4712.5 h60
  text "PTH" at 3327.9,4712.5 h60
  text "Round" at 3833.78,4712.5 h60
  text "Top Layer - Bottom Layer" at 4567.58,4712.5 h60
  text "Pad" at 6067.13,4712.5 h60
  text "(Mixed)" at 6656.98,4712.5 h60
  text "(Mixed)" at 7402.78,4712.5 h60
  text "4" at 1638.38,4562.5 h60
  text "78.74mil (2.000mm)" at 2228.22,4562.5 h60
  text "NPTH" at 3327.9,4562.5 h60
  text "Round" at 3833.78,4562.5 h60
  text "Top Layer - Bottom Layer" at 4567.58,4562.5 h60
  text "Pad" at 6067.13,4562.5 h60
  text "Rounded" at 6656.98,4562.5 h60
  text "c152hn200" at 7402.78,4562.5 h60
  text "C" at 1103.41,4552.51 h66.67
  text "8" at 1638.38,4412.5 h60
  text "33.46mil (0.850mm)" at 2228.22,4412.5 h60
  text "PTH" at 3327.9,4412.5 h60
  text "Round" at 3833.78,4412.5 h60
  text "Top Layer - Bottom Layer" at 4567.58,4412.5 h60
  text "Pad" at 6067.13,4412.5 h60
  text "Rounded" at 6656.98,4412.5 h60
  text "c140h85" at 7402.78,4412.5 h60
  text "12" at 1638.38,4262.5 h60
  text "23.62mil (0.600mm)" at 2228.22,4262.5 h60
  text "PTH" at 3327.9,4262.5 h60
  text "Round" at 3833.78,4262.5 h60
  text "Top Layer - Bottom Layer" at 4567.58,4262.5 h60
  text "Pad" at 6067.13,4262.5 h60
  text "(Mixed)" at 6656.98,4262.5 h60
  text "(Mixed)" at 7402.78,4262.5 h60
  text "14" at 1638.38,4112.5 h60
  text "31.50mil (0.800mm)" at 2228.22,4112.5 h60
  text "PTH" at 3327.9,4112.5 h60
  text "Round" at 3833.78,4112.5 h60
  text "Top Layer - Bottom Layer" at 4567.58,4112.5 h60
  text "Pad" at 6067.13,4112.5 h60
  text "(Mixed)" at 6656.98,4112.5 h60
  text "(Mixed)" at 7402.78,4112.5 h60
  text "24" at 1638.38,3962.5 h60
  text "25.00mil (0.635mm)" at 2228.22,3962.5 h60
  text "PTH" at 3327.9,3962.5 h60
  text "Round" at 3833.78,3962.5 h60
  text "Top Layer - Bottom Layer" at 4567.58,3962.5 h60
  text "Pad" at 6067.13,3962.5 h60
  text "Rounded" at 6656.98,3962.5 h60
  text "c114h64m114" at 7402.78,3962.5 h60
  text "24" at 1638.38,3812.5 h60
  text "27.56mil (0.700mm)" at 2228.22,3812.5 h60
  text "PTH" at 3327.9,3812.5 h60
  text "Round" at 3833.78,3812.5 h60
  text "Top Layer - Bottom Layer" at 4567.58,3812.5 h60
  text "Pad" at 6067.13,3812.5 h60
  text "(Mixed)" at 6656.98,3812.5 h60
  text "(Mixed)" at 7402.78,3812.5 h60
  text "24" at 1638.38,3662.5 h60
  text "28.00mil (0.711mm)" at 2228.22,3662.5 h60
  text "PTH" at 3327.9,3662.5 h60
  text "Round" at 3833.78,3662.5 h60
  text "Top Layer - Bottom Layer" at 4567.58,3662.5 h60
  text "(Mixed)" at 6067.13,3662.5 h60
  text "Rounded" at 6656.98,3662.5 h60
  text "(Mixed)" at 7402.78,3662.5 h60
  text "48" at 1638.38,3512.5 h60
  text "35.43mil (0.900mm)" at 2228.22,3512.5 h60
  text "PTH" at 3327.9,3512.5 h60
  text "Round" at 3833.78,3512.5 h60
  text "Top Layer - Bottom Layer" at 4567.58,3512.5 h60
  text "Pad" at 6067.13,3512.5 h60
  text "(Mixed)" at 6656.98,3512.5 h60
  text "(Mixed)" at 7402.78,3512.5 h60
  text "168 Total" at 1638.38,3362.5 h60

## Dimensions
1385,1085 to 5465,1085 on Top Layer

## Text inside footprints (layer, text, board x,y; h text height)
P11: Top Overlay "2" at 3335,1360 h60; Top Overlay "6" at 3345,1120 h60; Top Overlay "5" at 3055,1140 h60; Top Overlay "1" at 3135,1440 h60
U1: Top Overlay "*" at 2542.5,1952.48 h50; Mechanical 13 "*" at 2635.5,1937.48 h50